# Altium PCB PCB2.PcbDoc (part 1 of 3)
Units mil, origin at the board's own origin, x right, y up, seen from the top; angles counter-clockwise.
Board outline 3877.63 x 3875.01 mil, 2 copper layers (Top Layer, Bottom Layer); 98 components, 72 nets, 361 pads, 109 vias.
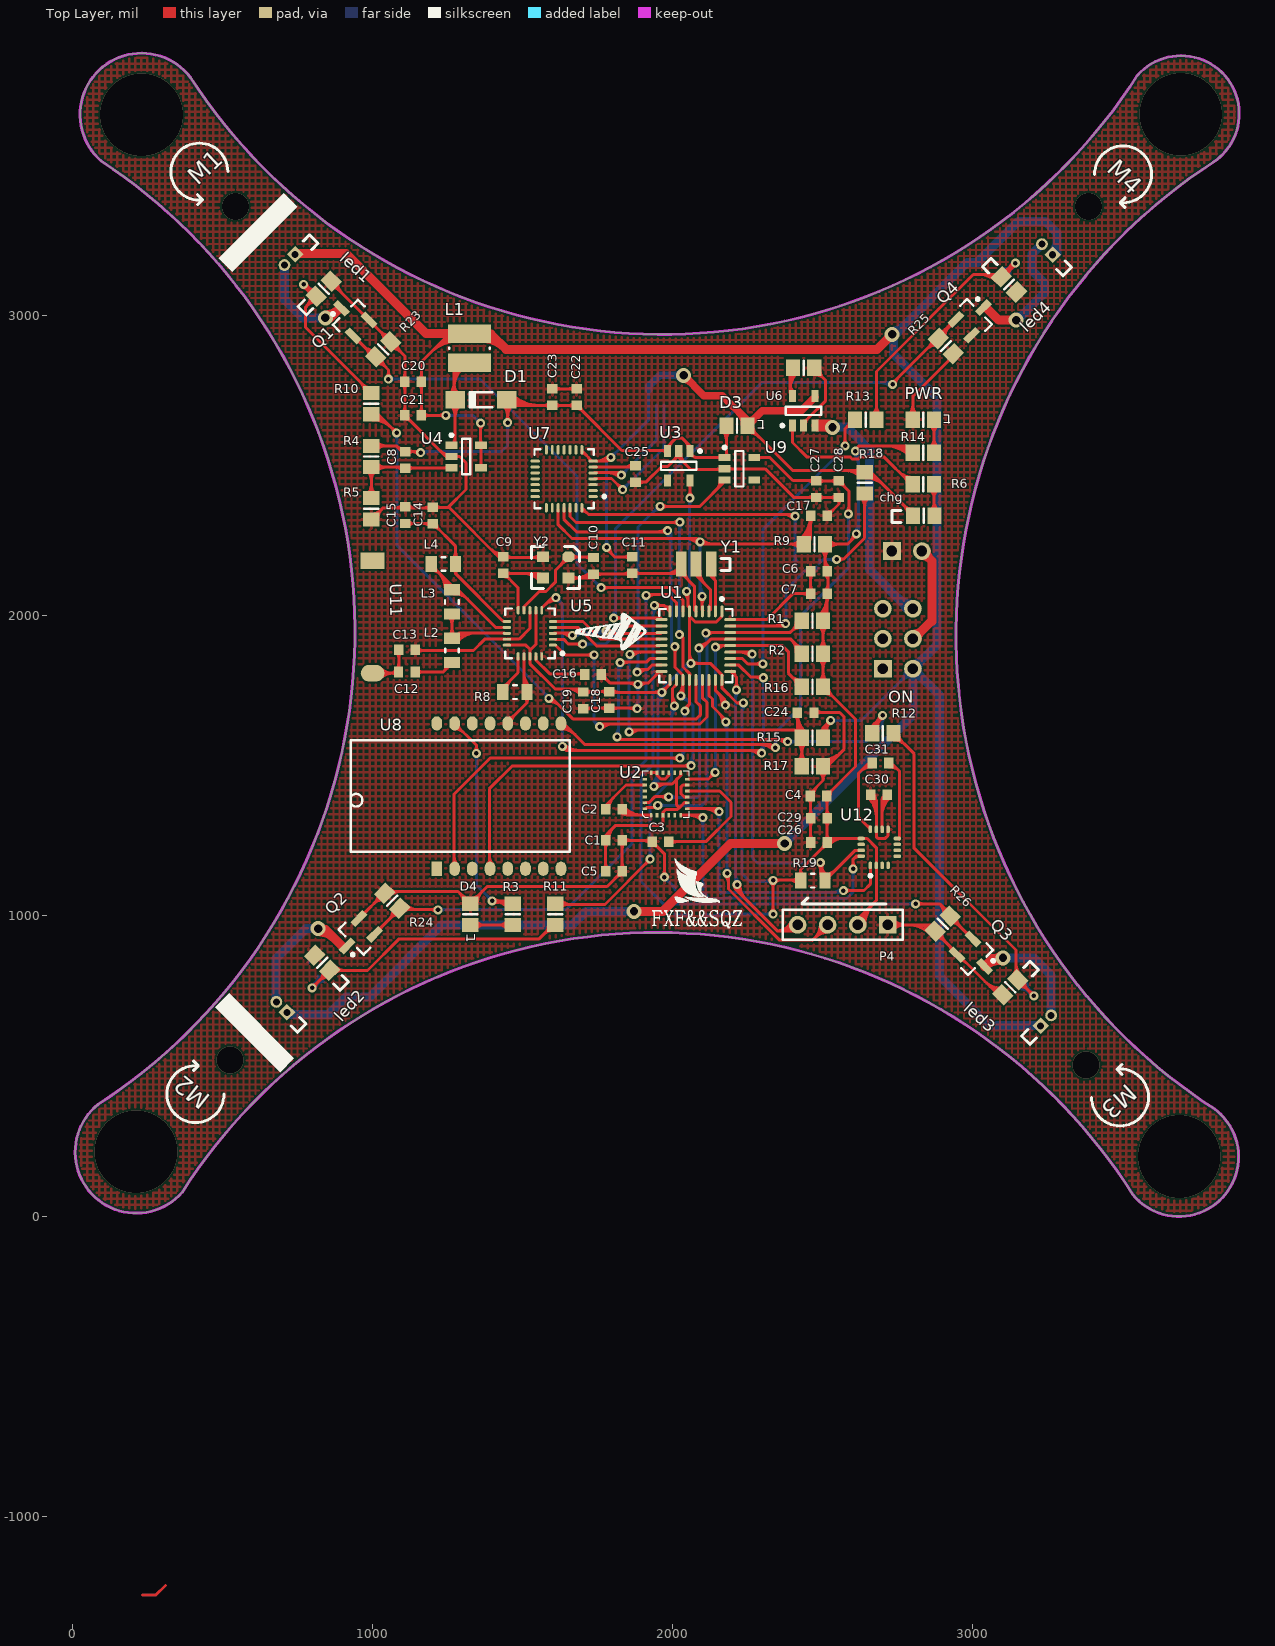
[diagram p0: Top Layer view]
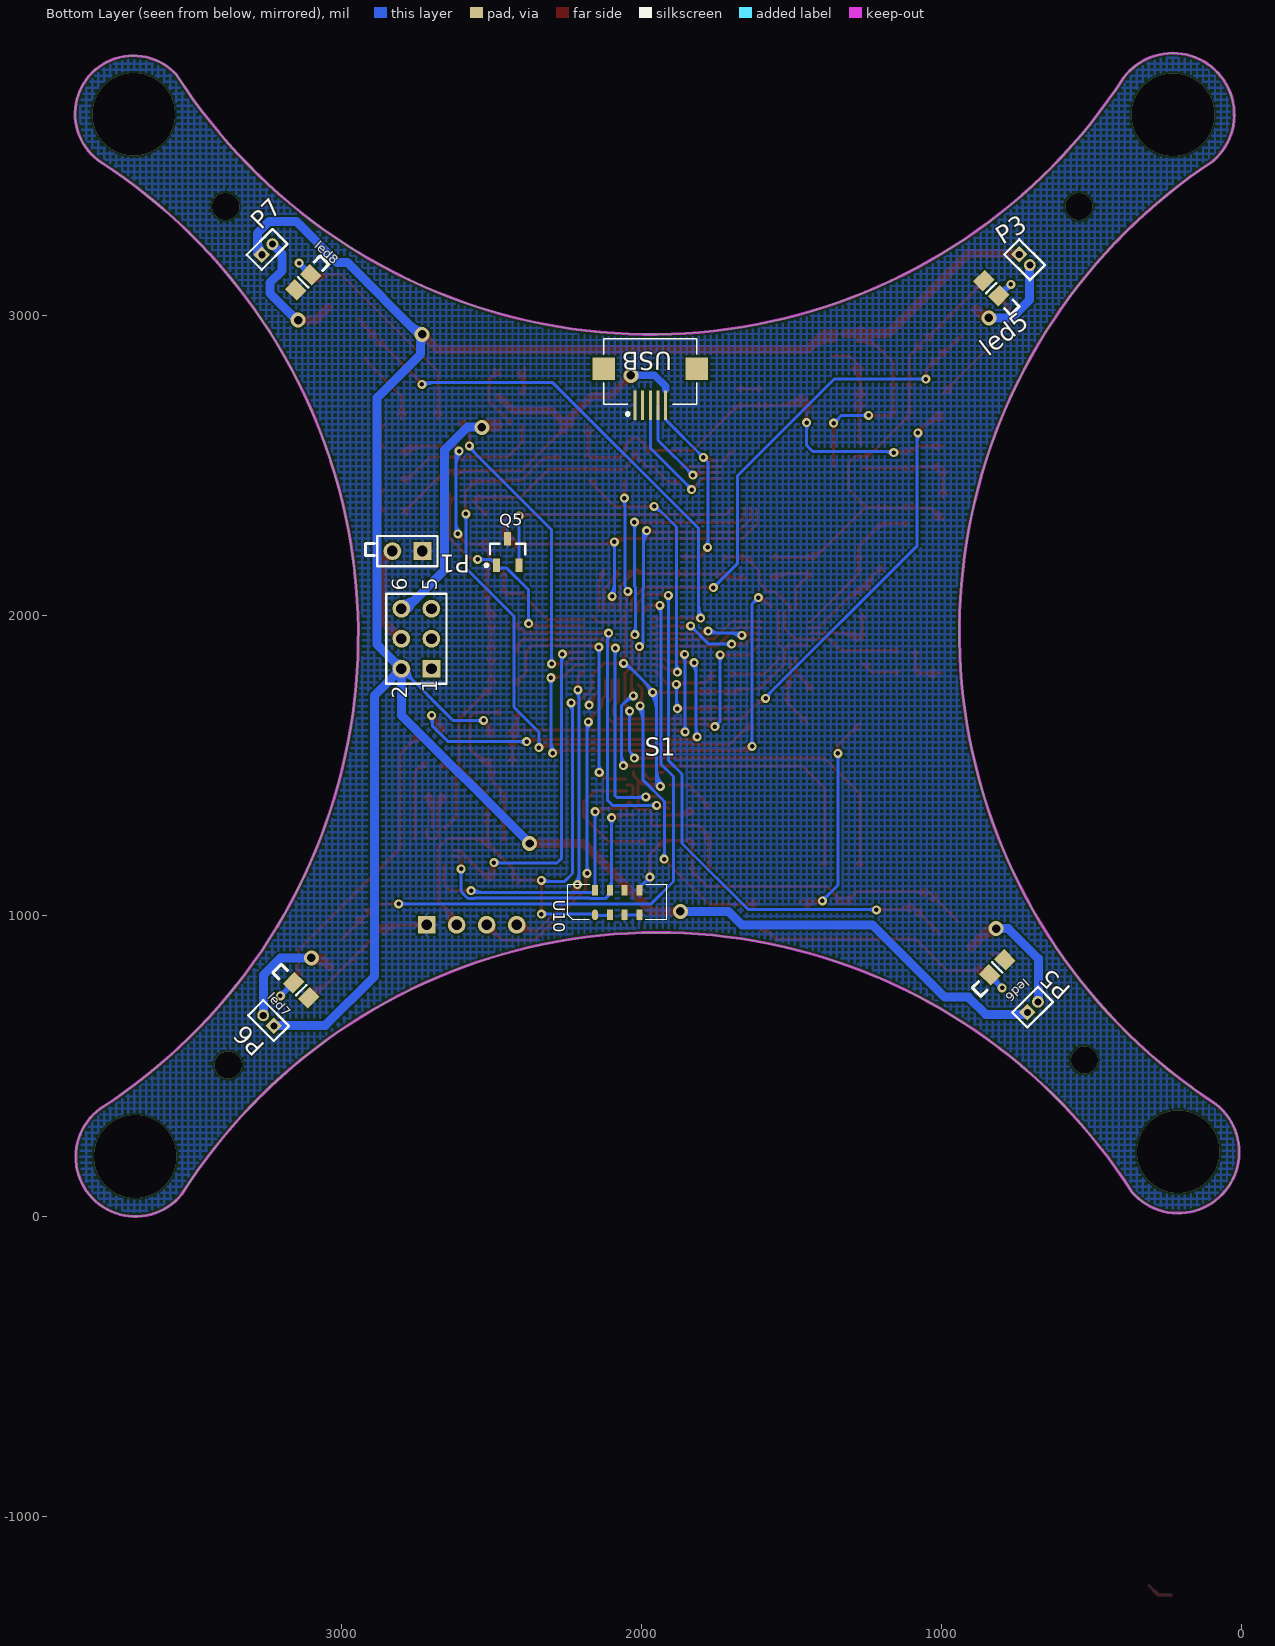
[diagram p1: Bottom Layer view, seen from below]

## Layer stack, top to bottom
Top Layer: signal copper 1.4
Dielectric: dielectric 12.6, FR-4, Dk 4.8
Bottom Layer: signal copper 1.4

## Board outline
86.18,372.01 ccw(c212.62,212.73) 365.52,78.65 cw(c1946.65,-932.35) 3532.41,71.36 ccw(c3686.13,197.12) 3804.23,356.81 cw(c4820.35,1934.65) 3800.24,3509.91 ccw(c3693.09,3671.43) 3547.82,3799.77 cw(c1968.35,4813.35) 392.96,3793.44 ccw(c230.45,3668.91) 97.08,3513.57 cw(c-935.35,1946.35)

## Design rules (kind name [scope] priority, off if disabled: settings)
Clearance [All] p1: gap=6
HoleSize [All] p1: absolutevalues=TRUE maxlimit=300 minlimit=1 maxpercent=80.000 minpercent=20.000
PolygonConnect [All] p1: connectstyle=Relief reliefconductorwidth=10 reliefentries=4 polygonreliefangle="90 Angle"
RoutingVias [All] p1: holewidth=15 width=30 viastyle="Through Hole" minholewidth=12 minwidth=20 maxholewidth=300 maxwidth=300
SMDNeckDown [All] p1: percent=300.000
SilkscreenOverComponentPads [All] p1: minsilkscreentomaskgap=3
SolderMaskExpansion [All] p1: expansion=4
Width [All] p1: maxlimit=40 minlimit=6 preferedwidth=10
26 further rules are at their usual default settings.

## Classes and differential pairs
component class Sheet3: C25 C26 C27 C28 C29 C30 C31 D4 led1 led2 led3 led4 led5 led6 led7 led8 Q5 R3 R10 R11 R12 R13 R18 R19 U7 U8 U9 U10 U12
component class Sheet2: C1 C2 C3 C4 C5 C6 C7 C8 C9 C10 C11 C12 C13 C14 C15 C16 C17 C18 C19 C20 C21 C22 C23 C24 chg D1 D3 L1 L2 L3 L4 P1 P3 P4 P5 P6 P7 PWR Q1 Q2 Q3 Q4 R1 R2 R4 R5 R6 R7 R8 R9 R14 R15 R16 R17 R23 R24 R25 R26 S1 U1 U2 U3 U4 U5 U6 U11 USB Y1 Y2

## Components (designator, comment, footprint, x,y, rotation, side; value= is the part's Value field where it differs from the comment)
C1 "1uf" 1608[0603] 1804,1251.5 r0 top
C2 "2.2nf" 1608[0603] 1804,1355 r180 top
C3 "0.1uf" 1608[0603] 1959,1247 r180 top
C4 "104" 1608[0603] 2486,1399 r180 top
C5 "1uf" 1608[0603] 1804,1148 r0 top
C6 "104" 1608[0603] 2487,2148 r180 top
C7 "2.2uF" 1608[0603] 2487,2073 r180 top
C8 "220PF" 1608[0603] 1109,2519 r270 top
C9 "22p" 1608[0603] 1435,2168 r90 top
C10 "22p" 1608[0603] 1736,2166 r90 top
C11 "10uf" 1608[0603] 1865,2168 r270 top
C12 "1.5pF" 1608[0603] 1114,1812 r0 top
C13 "1pF" 1608[0603] 1115,1886 r180 top
C14 "2.2nF" 1608[0603] 1201,2333 r270 top
C15 "4.7pF" 1608[0603] 1109.41,2334.35 r270 top
C16 "33nF" 1608[0603] 1735,1804 r180 top
C17 "2.2uF" 1608[0603] 2487,2333 r180 top
C18 "104" 1608[0603] 1789,1719 r90 top
C19 "2.2uF" 1608[0603] 1702,1718 r90 top
C20 "10UF" 1608[0603] 1135,2779 r0 top
C21 "104" 1608[0603] 1135,2667 r0 top
C22 "104" 1608[0603] 1680,2727.86 r90 top
C23 "1uF" 1608[0603] 1599,2727.86 r90 top
C24 "1uF" 1608[0603] 2443,1676 r0 top
C25 "2.2uF" 1608[0603] 1876,2472 r90 top
C26 "2.2uF" 1608[0603] 2487,1244 r0 top
C27 "104" 1608[0603] 2478,2421 r270 top
C28 "2.2uF" 1608[0603] 2553,2421 r270 top
C29 "0.1uF" 1608[0603] 2487,1325 r0 top
C30 "4.7uF" 1608[0603] 2687,1403 r0 top
C31 "0.22uF" 1608[0603] 2692,1509 r180 top
chg "LED" 6-0805_N 2836,2332 r0 top
D1 "MBR0520" CAPCP5113X06N 1361,2719 r0 top
D3 "1N4148" 6-0805_N 2214,2633 r180 top
D4 "sta" 6-0805_N 1326,1005 r90 top
L1 "10UH" INDC3035X06N 1323,2891 r270 top
L2 "3.9nH" 0805 1265,1884 r90 top
L3 "8.2nH" 0805 1264,2046 r270 top
L4 "2.7nH" 0805 1236,2172 r180 top
led1 "LED" 6-0805_N 836.97,3089 r45 top
led2 "LED" 6-0805_N 832,843 r135 top
led3 "LED" 6-0805_N 3124,762 r225 top
led4 "LED" 6-0805_N 3120,3103 r315 top
led5 "LED" 6-0805_N 835,3091 r45 bottom
led6 "LED" 6-0805_N 815,828 r135 bottom
led7 "LED" 6-0805_N 3134,752 r225 bottom
led8 "LED" 6-0805_N 3127,3110 r315 bottom
P1 "Header 2" HDR1X2 2730,2215 r0 bottom
P3 "Motor1" MHDR1X2 741.97,3203 r225 bottom
P4 "SWD" HDR1X4 2716,970 r180 top
P5 "Motor2" MHDR1X2 715,678 r135 bottom
P6 "Motor3" MHDR1X2 3225,633 r45 bottom
P7 "Motor4" MHDR1X2 3265,3202 r135 bottom locked
PWR "LED" 6-0805_N 2835,2653 r180 top
Q1 "SI2302" SOT23_M 929,2991 r135 top
Q2 "SI2302" SOT23_M 948,932 r225 top
Q3 "SI2302" SOT23_M 3006,864 r315 top
Q4 "SI2302" SOT23_M 3002,2993 r45 top
Q5 "S8050" SOT-23B_N 2446,2212 r90 bottom
R1 "3K" 6-0805_N 2465.35,1983 r180 top
R2 "3K" 6-0805_N 2465.35,1873 r180 top
R3 "100" 6-0805_N 1467,1005 r270 top
R4 "33K" 6-0805_N 996,2530 r270 top
R5 "10K" 6-0805_N 996,2356 r90 top
R6 "100R" 6-0805_N 2835,2438 r180 top
R7 "1.65K" 6-0805_N 2436,2825 r180 top
R8 "22K" 0805 1474,1745 r0 top
R9 "10K" 6-0805_N 2472,2238 r0 top
R10 "360R" 6-0805_N 996,2706 r270 top
R11 "360R" 6-0805_N 1608,1005 r90 top
R12 "360R" 6-0805_N 2700,1608 r0 top
R13 "360R" 6-0805_N 2643,2652 r0 top
R14 "1.65K" 6-0805_N 2835,2543 r0 top
R15 "33K" 6-0805_N 2465.35,1593 r0 top
R16 "3K" 6-0805_N 2465.35,1763 r0 top
R17 "33K" 6-0805_N 2465.35,1498 r0 top
R18 "10K" 6-0805_N 2639,2442 r270 top
R19 "3K" 0805 2466.33,1117 r180 top
R23 "10K" 6-0805_N 1035,2887 r45 top
R24 "33K" 6-0805_N 1065,1050 r135 top
R25 "33k" 6-0805_N 2910,2898 r315 top
R26 "33k" 6-0805_N 2899,974 r225 top
S1 "SW-SPDT" HDR2X3 2700,1823 r90 bottom
U1 "STM32F10T8U6" stm32f1038tu6 2077,1900 r270 top
U2 "MPU6050" U8 1928,1335 r90 top
U3 "MIC5205-3.3" SOT95P280X120-5N 2020,2499 r270 top
U4 "LM27313" SOT95P280X120-5N 1311.79,2530 r0 top
U5 "NRF24L01" QFN-ML20_L 1524.2,1941 r180 top
U6 "LTC4054" SOT95P280X120-5N 2436,2682 r90 top
U7 "CP2102" cp2102 1638,2455.69 r180 top
U8 "HM-06" HM-11 1355,1388 r90 top
U9 "MIC5205-3.3" SOT95P280X120-5N 2222,2489.16 r0 top
U10 "MS5611" "U6 - duplicate1" 2155,1003 r90 bottom
U11 "ANT" AN9520-245 995,2008 r180 top
U12 "HMC5833" QFN50P302X302X90-16N 2687.76,1228 r90 top
USB "Header 5" USB_MICRO_B 1971,2701 r90 bottom
Y1 "XTAL8M" CAPC1219X07N 2103,2172 r180 top
Y2 "Component_1" XTAL16MHz 1653,2200.5 r180 top

## Footprints (in the part's own frame and the unit in brackets; to place one, negate y for a bottom-side part, rotate by r counter-clockwise, add the part's x,y. Pads: shape width x height; smd on the part's side, far side on the other; paste and mask are expansions set on the pad)
6-0805_N [mm]
  rect 1.2x1.4 smd: 1(-0.9,0) 2(0.9,0)
  silkscreen extent 0,-0.6 0,0.6, body extent -1.07,-0.7 1.07,0.7, height 0.7
0805 [mm] "Chip Capacitor, 2-Leads, Body 2.0x1.2mm, IPC Medium Density"
  rect 0.95x1.35 smd: 1(-1.025,0) 2(1.025,0)
  silkscreen extent -0.15,-0.58 0.15,0.58, body extent -1.05,-0.65 1.05,0.65, height 0.5
1608[0603] [mm] "Chip Capacitor, Body 1.6x0.8mm, IPC High Density"
  rect 0.8x0.9 smd: 1(-0.7,0) 2(0.7,0)
  body extent -0.87,-0.48 0.87,0.48, height 1.3
AN9520-245 [mm]
  oval 2x1.4 smd: 1(-0.127,5.08)
  rect 2x1.4 smd: 2(-0.127,-4.42)
CAPC1219X07N [mm] "Chip Capacitor, 2-Leads, Body 1.2x1.9mm, IPC Medium Density"
  rect 0.9x2.1 smd: 1(-0.65,0) 2(0.65,0) 3(1.905,0)
  body extent 0.03,-2.05 1.29,-0.05, height 0.7
CAPCP5113X06N [mm] "Chip Capacitor, 2-Leads, Body 5.1x1.3mm, IPC Medium Density"
  rect 1.65x1.45 smd: 1(-2.175,0) 2(2.175,0)
  silkscreen extent -0.95,-0.63 0.95,0.62, body extent -2.6,-0.7 2.6,0.7, height 0.6
cp2102 [mm]
  oval 0.8x0.25 smd: 1(-2.45,1.5) 2(-2.45,1) 3(-2.45,0.5) 4(-2.45,0) 5(-2.45,-0.5) 6(-2.45,-1) 7(-2.45,-1.5) 15(2.45,-1.5) 16(2.45,-1) 17(2.45,-0.5) 18(2.45,0) 19(2.45,0.5) 20(2.45,1) 21(2.45,1.5)
  oval 0.25x0.8 smd: 8(-1.5,-2.45) 9(-1,-2.45) 10(-0.5,-2.45) 11(0,-2.45) 12(0.5,-2.45) 13(1,-2.45) 14(1.5,-2.45) 22(1.5,2.45) 23(1,2.45) 24(0.5,2.45) 25(0,2.45) 26(-0.5,2.45) 27(-1,2.45) 28(-1.5,2.45)
  silkscreen extent -3.53,-2.5 2.5,2.5, body extent -2.5,-2.5 2.5,2.5, height 1
HDR1X2 [mm] "Connector; Header; 2 Position"
  rect 1.5x1.5 hole 0.9: 1(0,0)
  round 1.5 hole 0.9: 2(2.54,0)
  silkscreen extent -1.27,-1.27 3.81,1.27
HDR1X4 [mm] "Connector; Header; 4 Position"
  rect 1.5x1.5 hole 0.9: 1(0,0)
  round 1.5 hole 0.9: 2(2.54,0) 3(5.08,0) 4(7.62,0)
  silkscreen extent -1.27,-1.27 8.89,1.27
HDR2X3 [mm]
  rect 1.5x1.5 hole 0.9: 1(0,0)
  round 1.5 hole 0.9: 2(0,2.54) 3(2.54,0) 4(2.54,2.54) 5(5.08,0) 6(5.08,2.54)
  silkscreen extent -1.27,-1.27 6.35,3.81
HM-11 [mm]
  rect 1.2x0.9 smd: 1(-5.875,3.575)
  oval 1.2x0.9 smd: 2(-5.875,2.075) 3(-5.875,0.575) 4(-5.875,-0.925) 5(-5.875,-2.425) 6(-5.875,-3.925) 7(-5.875,-5.425) 8(-5.875,-6.925) 9(6.425,-6.925) 10(6.425,-5.425) 11(6.425,-3.925) 12(6.425,-2.425) 13(6.425,-0.925) 14(6.425,0.575) 15(6.425,2.075) 16(6.425,3.575)
  silkscreen extent -4.45,-7.68 4.99,10.88
INDC3035X06N [mm] "Chip Inductor, 2-Leads, Body 3.0x3.5mm, IPC Medium Density"
  rect 1.55x3.65 smd: 1(-1.225,0) 2(1.225,0)
  silkscreen extent -0.05,-1.73 0.05,1.73, body extent -1.55,-1.8 1.55,1.8, height 0.6
MHDR1X2 [mm] "Connector; Header; 2 Position"
  rect 1x1 hole 0.6: 1(0,0)
  round 1 hole 0.6: 2(1.27,0)
  silkscreen extent -0.9,-0.9 2.17,0.9
QFN50P302X302X90-16N [mm] "QFN, 16-Leads, Body 3.0x3.0mm (max), Pitch 0.50mm, IPC Medium Density"
  oval 0.65x0.3 smd: 1(-1.525,0.75) 2(-1.525,0.25) 3(-1.525,-0.25) 4(-1.525,-0.75) 9(1.525,-0.75) 10(1.525,-0.25) 11(1.525,0.25) 12(1.525,0.75)
  oval 0.3x0.65 smd: 5(-0.75,-1.525) 6(-0.25,-1.525) 7(0.25,-1.525) 8(0.75,-1.525) 13(0.75,1.525) 14(0.25,1.525) 15(-0.25,1.525) 16(-0.75,1.525)
  silkscreen extent -2.52,0.63 -2.28,0.87
QFN-ML20_L [mm]
  oval 0.7x0.25 smd: 1(-1.95,1) 2(-1.95,0.5) 3(-1.95,0) 4(-1.95,-0.5) 5(-1.95,-1) 11(1.95,-1) 12(1.95,-0.5) 13(1.95,0) 14(1.95,0.5) 15(1.95,1)
  oval 0.25x0.7 smd: 6(-1,-1.95) 7(-0.5,-1.95) 8(0,-1.95) 9(0.5,-1.95) 10(1,-1.95) 16(1,1.95) 17(0.5,1.95) 18(0,1.95) 19(-0.5,1.95) 20(-1,1.95)
  silkscreen extent -2.88,-2.1 2.1,2.1
SOT23_M [mm] "SOT23, 3-Leads, Body 2.9x1.3mm, Pitch 0.95mm, Lead Span 2.3mm - Reverse Pinning, IPC Low Density"
  rect 1.45x0.6 smd: 1(1.175,0) 2(-1.175,-0.95) 3(-1.175,0.95)
  silkscreen extent -0.1,-1.5 1.47,1.5, body extent -0.7,-1.5 0.7,1.5, height 1.1
SOT95P280X120-5N [mm] "SOT23, 5-Leads, Body 3.0x3.0mm (max), Pitch 0.95mm, IPC Medium Density"
  rect 1x0.6 smd: 1(-1.25,0.95) 2(-1.25,0) 3(-1.25,-0.95) 4(1.25,-0.95) 5(1.25,0.95)
  silkscreen extent -1.37,-1.5 0.35,1.93, body extent -0.85,-1.5 0.85,1.5, height 1.2
SOT-23B_N [mm] "SOT23, 3-Leads, Body 2.9x1.3mm, Pitch 0.95mm, Lead Span 2.4mm, IPC Medium Density"
  rect 1.15x0.6 smd: 1(-1.125,0.95) 2(-1.125,-0.95) 3(1.125,0)
  silkscreen extent -1.25,-1.5 0.7,1.93, body extent -0.7,-1.5 0.7,1.5, height 1.14
stm32f1038tu6 [mm] "QFN, 36-Leads, Body 6.1x6.1mm (max), Pitch 0.55mm, IPC Medium Density"
  oval 1x0.25 smd: 1(-2.9,2.2) 2(-2.9,1.65) 3(-2.9,1.1) 4(-2.9,0.55) 5(-2.9,0) 6(-2.9,-0.55) 7(-2.9,-1.1) 8(-2.9,-1.65) 9(-2.9,-2.2) 19(2.9,-2.2) 20(2.9,-1.65) 21(2.9,-1.1) 22(2.9,-0.55) 23(2.9,0) 24(2.9,0.55) 25(2.9,1.1) 26(2.9,1.65) 27(2.9,2.2)
  oval 0.25x1 smd: 10(-2.2,-2.9) 11(-1.65,-2.9) 12(-1.1,-2.9) 13(-0.55,-2.9) 14(0,-2.9) 15(0.55,-2.9) 16(1.1,-2.9) 17(1.65,-2.9) 18(2.2,-2.9) 28(2.2,2.9) 29(1.65,2.9) 30(1.1,2.9) 31(0.55,2.9) 32(0,2.9) 33(-0.55,2.9) 34(-1.1,2.9) 35(-1.65,2.9) 36(-2.2,2.9)
  silkscreen extent -4.07,-3.1 3.1,3.1, body extent -3.06,-3.06 3.06,3.06, height 1
"U6 - duplicate1" [mm]
  oval 0.9x0.5 smd: 1(0,0)
  rect 0.9x0.5 smd: 2(0,-1.25) 3(0,-2.5) 4(0,-3.75) 5(2.1,-3.75) 6(2.1,-2.5) 7(2.1,-1.25) 8(2.1,0)
  silkscreen extent -0.42,-6.1 2.54,2.33
U8 [mm]
  oval 0.4x0.23 smd: 1(0,0)
  rect 0.4x0.23 smd: 2(0,-0.5) 3(0,-1) 4(0,-1.5) 5(0,-2) 6(0,-2.5) 13(3.6,-2.5) 14(3.6,-2) 15(3.6,-1.5) 16(3.6,-1) 17(3.6,-0.5) 18(3.6,0)
  rect 0.23x0.4 smd: 7(0.55,-3.05) 8(1.05,-3.05) 9(1.55,-3.05) 10(2.05,-3.05) 11(2.55,-3.05) 12(3.05,-3.05) 19(3.05,0.55) 20(2.55,0.55) 21(2.05,0.55) 22(1.55,0.55) 23(1.05,0.55) 24(0.55,0.55)
  silkscreen extent -0.18,-3.22 3.77,0.73
USB_MICRO_B [mm]
  rect 2.5x0.25 smd: 1(0,-1.3) 2(0,-0.65) 3(0,0) 4(0,0.65) 5(0,1.3)
  rect 1.9x1.9 smd: ""(3.095,-3.95) ""(3.095,3.95)
  silkscreen extent -0.87,-3.94 5.6,3.94, body extent 0.24,-4 5.67,3.98, height 2.71
XTAL16MHz [mm] "无"
  oct 1x0.9 smd: 1(0,0.127)
  rect 1x0.9 smd: 2(2.159,0.127) 3(2.159,1.905) 4(0,1.905)

## Part data
C1 C2 C3 C4 C5 C6 C7 C8 C9 C10 C11 C12 C13 C14 C15 C16 C17 C18 C19 C20 C21 C22 C23 C24 C25 C26 C27 C28 C29 C30 C31: library part "Cap Semi", "Capacitor (Semiconductor SIM Model)"
chg led1 led2 led3 led4 led5 led6 led7 led8 PWR: library part LED2, "Typical RED, GREEN, YELLOW, AMBER GaAs LED"
D1: library part "D Zener", "Zener Diode"
D3 D4: library part Diode, "Default Diode"
L1 L2 L3 L4: library part Inductor, "Inductor"
P1: "Header, 2-Pin"
P3 P5 P6 P7: library part MHDR1X2, "Header, 2-Pin"
P4: library part "Header 4", "Header, 4-Pin"
Q1 Q2 Q3 Q4 U5 U10 U11 U12: library part Component_1
Q5: library part QNPN, "NPN Bipolar Transistor"
R1 R2 R3 R4 R5 R6 R7 R9 R10 R11 R12 R13 R14 R15 R16 R17 R18 R23 R24 R25 R26: library part "Res Thermal"
R8 R19: library part Res3, "Resistor"
S1: library part SW-SPD, "SPDT Subminiature Toggle Switch, Right Angle Mounting, Vertical Actuat"
U8: library part bluetooth
USB: "Header, 5-Pin"

## Via types
v1: diameter 30, hole 15, Top Layer to Bottom Layer, 92 vias
v2: diameter 50, hole 28, Top Layer to Bottom Layer, 9 vias
v3: diameter 275.59, hole 275.59, Top Layer to Bottom Layer, 4 vias
v4: diameter 90.55, hole 90.55, Top Layer to Bottom Layer, 4 vias

## Nets (pads, with @x,y where several pads share a name; then routed paths per layer and width w, separated by ;. In a path a pad name is that pad's centre, name@x,y a point inside that pad or via, vN(x,y) a via of type N, cw(c..) or ccw(c..) an arc to the next point about the centre after c; other vN are vias at no path point)
AUXDA: U2.6 U10.7 U12.16 | length 1219.5
  Top Layer w10: U2.6@2026.42,1335 2100,1335 v1(2100,1327) ccw(c2080.69,1307.69) 2080.69,1335 ; 2056.54,1335 cw(c2056.54,1283.54) v1@2092.93,1319.93 ; v1@2593.93,1163.07 ccw(c2576.86,1180.14) 2601,1180.14 ccw(c2625.14,1180.14) v1@2608.07,1163.07 ; v1(2601,1156) 2601,1188.69 2610.78,1198.47 U12.16@2627.72,1198.47 ; 2602.13,1189.82 cw(c2620.83,1171.12) U12.16@2620.83,1197.57
  Bottom Layer w10: v1@2092.93,1319.93 cw(c2075.86,1302.86) 2100,1302.86 cw(c2124.14,1302.86) v1@2107.07,1319.93 ; U10.7@2100,1088 v1(2100,1327) ; 2100,1119.22 ccw(c2131.45,1119.22) U10.7@2109.21,1096.98 ; U10.7@2101,1077 2121.04,1056.96 2169.4,1056.96 2171.44,1059 2556.23,1059 2557.23,1058 2578.77,1058 2601,1080.23 v1(2601,1156) ; U10.7@2110.63,1077.8 ccw(c2135.82,1077.8) 2118.01,1059.99 ; v1@2593.93,1148.93 cw(c2576.86,1131.86) 2601,1131.86 cw(c2625.14,1131.86) v1@2608.07,1148.93
AUXDL: U2.7 U10.8 U12.1 | length 1194.8
  Top Layer w10: U2.7@2048.08,1356.65 2154.35,1356.65 v1(2154.35,1346.65) ccw(c2130.2,1322.51) 2130.2,1356.65 ; 2106.06,1356.65 cw(c2106.06,1298.37) v1@2147.27,1339.58 ; v1@2563,1084 2637,1084 2658.24,1105.24 U12.1@2658.24,1167.96 ; v1@2575.07,1076.93 cw(c2592.14,1059.86) 2592.14,1084 cw(c2592.14,1108.14) v1@2575.07,1091.07
  Bottom Layer w10: v1@2147.27,1339.58 cw(c2130.2,1322.51) 2154.35,1322.51 cw(c2178.49,1322.51) v1@2161.42,1339.58 ; U10.8@2151.58,1096.98 ccw(c2144.89,1103.66) 2154.35,1103.66 ; U10.8@2154.35,1090.35 v1(2154.35,1346.65) ; 2154.35,1106.82 ccw(c2168.27,1106.82) U10.8@2158.42,1096.98 ; U10.8@2155,1087 2164,1078 2557,1078 2563,1084 v1(2568,1084) cw(c2553.51,1098.49) 2553.51,1078 ; U10.8@2158.42,1074.38 cw(c2167.16,1065.64) 2167.16,1078 ; U10.8@2158.42,1081.23 ccw(c2166.22,1089.02) 2166.22,1078 ; 2529.37,1078 ccw(c2529.37,1122.63) v1@2560.93,1091.07
BAT: P1.2 S1.4 | length 438
  Top Layer w30: S1.4@2800,1937.53 ccw(c2800,1979.84) 2829.92,1949.92 ; S1.4@2805,1925 2861,1981 ; S1.4@2814.53,1923 cw(c2842.36,1923) 2822.68,1942.68 ; P1.2@2830,2200.47 cw(c2830,2165.4) 2854.8,2190.2 cw(c2879.6,2215) P1.2@2844.53,2215 ; P1.2@2830,2215 2863,2182 2863,1980
BAT_CHECK: C24.1 R15.1 R17.1 U1.15 | length 1640.2
  Top Layer w10: v1(1855,1613) cw(c1869.49,1598.51) 1869.49,1619 ; v1(1857,1871) cw(c1874.73,1853.27) 1874.73,1878.35 ; v1@1857,1878.35 U1.15@1962.83,1878.35 ; v1@1859,1613 1865,1619 2408,1619 R15.1@2422,1605 ; v1@1862.07,1605.93 cw(c1893.63,1574.37) 1893.63,1619 ; v1@1864.07,1863.93 cw(c1898.88,1829.12) 1898.88,1878.35 ; C24.1@2407.84,1666.43 cw(c2389.49,1648.08) 2415.44,1648.08 cw(c2441.39,1648.08) C24.1@2423.04,1666.43 ; 2415.44,1628.22 ccw(c2460.73,1628.22) R15.1@2428.95,1595.96 ; 2415.44,1652.11 ccw(c2484.27,1652.11) R15.1@2435.96,1603.08 ; R17.1@2416.75,1515.1 ccw(c2384.75,1547.1) 2430,1547.1 ; R15.1@2416.75,1575.9 cw(c2384.75,1543.9) 2430,1543.9 ; R17.1@2430,1501 2430,1584 2415.44,1598.56 C24.1@2415.44,1676 ccw(c2507.8,1676) R15.1@2442.98,1610.2 ; 2430,1544.31 cw(c2474.66,1544.31) R15.1@2443.08,1575.9 ; 2430,1546.69 ccw(c2474.66,1546.69) R17.1@2443.08,1515.1
  Bottom Layer w10: v1@1847.93,1620.07 ccw(c1830.86,1637.14) 1855,1637.14 ccw(c1879.14,1637.14) v1@1862.07,1620.07 ; v1@1849.93,1863.93 cw(c1837.69,1851.69) 1855,1851.69 ; v1@1855,1617 v1@1855,1868 ; 1855,1842.03 cw(c1885.97,1842.03) v1@1864.07,1863.93
BOOT0: Q5.1 R18.2 U1.35 | length 1052.9
  Top Layer w10: U1.35@2191.17,1964.96 v1@2373,1964.96 ; 2332.45,1964.96 ccw(c2332.45,2016.55) v1@2368.93,1980.07 ; 2356.59,1964.96 ccw(c2356.59,1992.41) v1(2376,1973) ; v1@2548,2188 2569,2188 ; v1@2553.07,2194.07 ccw(c2567.73,2208.73) 2567.73,2188 ; v1@2553.78,2180.72 cw(c2569,2168.46) 2569,2188 ; R18.2@2625.83,2393.4 cw(c2594.04,2361.61) 2639,2361.61 cw(c2683.96,2361.61) R18.2@2652.17,2393.4 ; R18.2@2639,2406.57 2639,2258 2569,2188
  Bottom Layer w10: v1@2368.93,1980.07 ccw(c2349.44,1999.56) 2377,1999.56 ; v1@2377,1970 2377,2087 2377.9,2087 2448.9,2158 Q5.1@2483,2158 ; 2377,1994.73 ccw(c2397.73,1994.73) v1@2383.07,1980.07 ; 2464.26,2158 cw(c2464.26,2137.74) Q5.1@2478.59,2152.07 ; 2469.66,2158 ccw(c2469.66,2170.62) Q5.1@2478.59,2161.7 ; Q5.1@2486.52,2184.59 ccw(c2492.61,2196.39) 2502,2187 ; Q5.1@2487,2172 2502,2187 ; v1@2538.93,2179.93 ccw(c2521.86,2162.86) 2521.86,2187 ccw(c2521.86,2211.14) v1@2538.93,2194.07 ; v1(2546,2187) 2502,2187
BT_EN: U1.17 U9.3 | length 1146.2
  Top Layer w10: v1(1881,1812) cw(c1896.55,1800.88) 1896.55,1820 ; v1@1885,1820 1916,1820 ; v1@1889.13,1806.18 cw(c1916,1786.97) 1916,1820 ; v1(1958,2364) 1959,2363 2089,2363 U9.3@2175,2449 ; U1.17@1962.83,1835.04 1931.04,1835.04 1916,1820 ; v1@1965.07,2356.93 cw(c1979.73,2342.27) 1979.73,2363 ; v1@1965.07,2371.07 ccw(c1984.56,2390.56) 1984.56,2363 ; 2144.21,2418.21 ccw(c2110.66,2451.76) U9.3@2158.1,2451.76 ; 2161.28,2435.28 ccw(c2144.8,2451.76) U9.3@2168.1,2451.76
  Bottom Layer w10: v1@1873.93,1819.07 ccw(c1849.62,1843.38) 1884,1843.38 ; 1884,1828.9 ccw(c1897.9,1828.9) v1@1888.07,1819.07 ; v1@1889,1816 1884,1821 1884,2295 v1@1955.5,2366.5 ; 1932.39,2343.39 cw(c1958,2317.79) v1@1958,2354 ; 1944.46,2355.46 ccw(c1935.93,2364) v1@1948,2364 ; v1(1958,2364) v1@1958,2372
CE: U1.24 U5.1 | length 1070.7
  Top Layer w10: U5.1@1611,1900 1642,1869 v1(1738,1869) ; v1@1730.93,1861.93 ccw(c1713.86,1844.86) 1713.86,1869 ccw(c1713.86,1893.14) v1@1730.93,1876.07 ; v1@1763.07,1622.93 cw(c1801.87,1584.13) 1801.87,1639 ; 1777.73,1639 ccw(c1777.73,1608.27) v1(1756,1630) 1765,1639 2091,1639 2114,1662 2114,1711 2098.65,1726.35 U1.24@2098.65,1785.83
  Bottom Layer w10: v1@1730.93,1861.93 cw(c1713.86,1844.86) 1738,1844.86 cw(c1762.14,1844.86) v1@1745.07,1861.93 ; v1@1736,1869 v1(1738,1869) 1738,1648 v1(1756,1630) ; v1@1746,1630 ccw(c1721.86,1630) 1738.93,1647.07 ccw(c1756,1664.14) v1@1756,1640
CHG5V: C11.1 chg.1 D3.1 R18.1 U6.4 U7.7 U7.8 USB.1 | length 3005.6
  Top Layer w10: U7.8@1697.06,2541.4 cw(c1697.06,2523.19) 1709.93,2536.07 ; U7.8@1697.06,2552.15 1697.06,2548.94 U7.7@1731,2515 ; 1718.37,2527.63 cw(c1705.5,2514.75) U7.7@1723.71,2514.75 ; 1767.27,2515 ccw(c1767.27,2550.76) v1(1794,2527) 1782,2515 ; v1@1776,2226 1806.44,2195.56 C11.1@1865,2195.56 ; v1@1780,2217 cw(c1780,2204.93) 1788.54,2213.46 ; v1@1784.39,2524.24 cw(c1775.35,2521.65) 1782,2515 ; v1@1786.53,2533.64 cw(c1745,2570.56) 1745,2515 1782,2515 ; v1@1790,2227 ccw(c1826.21,2227) 1800.61,2201.39 ; v1@1791.24,2517.39 ccw(c1788.65,2508.35) 1782,2515 ; C11.1@1855.43,2187.96 ccw(c1837.08,2169.61) 1837.08,2195.56 ccw(c1837.08,2221.51) C11.1@1855.43,2203.16 ; D3.1@2246,2650 D3.1@2246,2652 ; D3.1@2249.43,2610.44 cw(c2249.43,2555.98) 2287.94,2594.49 ; D3.1@2249.43,2620.44 cw(c2249.43,2590.12) D3.1@2270.87,2611.56 ; D3.1@2249.43,2633 2399.43,2483 2643,2483 R18.1@2645,2481 ; D3.1@2268.05,2629.06 ccw(c2303.51,2629.06) 2278.44,2603.99 ; 2576.67,2483 cw(c2576.67,2419.04) R18.1@2621.9,2464.27 ; 2600.81,2483 cw(c2600.81,2443.18) R18.1@2628.97,2471.34 ; 2603.54,2483 ccw(c2603.54,2508.95) R18.1@2621.9,2490.6 ; R18.1@2639,2477.43 2659.57,2477.43 chg.1@2796,2341 ; R18.1@2642.94,2458.81 cw(c2642.94,2373.71) 2703.11,2433.89 ; R18.1@2642.94,2468.81 cw(c2642.94,2407.85) 2686.04,2450.96 ; R18.1@2642.94,2478.81 cw(c2642.94,2441.99) 2668.97,2468.03 ; 2768.43,2368.57 cw(c2735.79,2335.94) chg.1@2781.95,2335.94 ; 2769.62,2367.38 ccw(c2800.57,2398.32) chg.1@2800.57,2354.56
  Top Layer w25: v2@2036,2787.5 cw(c2036,2757.32) 2057.34,2778.66 cw(c2078.68,2800) v2@2048.5,2800 ; v2(2036,2800) 2103,2733 2165,2733 D3.1@2246,2652 ; 2222.22,2675.78 cw(c2183.38,2636.94) D3.1@2238.31,2636.94 ; D3.1@2249.43,2633 2298.43,2682 2428,2682 U6.4@2475,2729 ; D3.1@2249.43,2648.06 ccw(c2249.43,2684.41) 2275.14,2658.71
  Bottom Layer w10: v1@1772.93,2234.07 ccw(c1758.27,2248.73) 1779,2248.73 ; 1779,2253.56 ccw(c1806.56,2253.56) v1@1787.07,2234.07 ; v1@1781,2231 1779,2233 1779,2512 v1(1794,2527) 1919.82,2652.82 USB.1@1919.82,2701 1919.82,2751.82 ; v1@1794,2537 ccw(c1794,2561.14) 1811.07,2544.07 ccw(c1828.14,2527) v1@1804,2527 ; 1917.2,2650.2 ccw(c1910.7,2656.71) USB.1@1919.9,2656.71
  Bottom Layer w25: 1919.82,2751.82 1919.82,2763.82 1957,2801 v2@2036,2801 ; 2003.41,2801 cw(c2003.41,2767.41) v2@2027.16,2791.16 ; 2008.24,2801 ccw(c2008.24,2827.76) v2@2027.16,2808.84
  other v1: 1780,2227
CSN: U1.11 U5.2 | length 538.8
  Top Layer w10: U5.2@1608,1921 1637,1921 1653,1905 v1(1700,1905) ; v1@1692.93,1897.93 ccw(c1675.86,1880.86) 1675.86,1905 ccw(c1675.86,1929.14) v1@1692.93,1912.07 ; v1(1837,1966) 1838.04,1964.96 U1.11@1962.83,1964.96 ; v1@1844.07,1958.93 cw(c1858.63,1944.37) 1858.63,1964.96 ; v1@1844.07,1973.07 ccw(c1863.65,1992.65) 1863.65,1964.96
  Bottom Layer w10: v1(1700,1905) 1776,1905 v1(1837,1966) ; v1@1707.07,1897.93 cw(c1724.14,1880.86) 1724.14,1905 cw(c1724.14,1929.14) v1@1707.07,1912.07 ; v1@1827,1966 cw(c1802.86,1966) 1819.93,1948.93 cw(c1837,1931.86) v1@1837,1956
D+: U7.4 USB.3 | length 525.3
  Top Layer w10: U7.4@1737,2457 1796,2457 v1(1833,2420) ; v1@1823,2420 ccw(c1798.86,2420) 1815.93,2437.07 ccw(c1833,2454.14) v1@1833,2430
  Bottom Layer w10: v1(1833,2420) 1971,2558 USB.3@1971,2701 ; v1@1833,2430 ccw(c1833,2454.14) 1850.07,2437.07 ccw(c1867.14,2420) v1@1843,2420
D-: U7.5 USB.2 | length 473.3
  Top Layer w10: U7.5@1740,2476 1821,2476 v1(1829,2468) ccw(c1809.69,2448.69) 1809.69,2476 ; 1785.54,2476 cw(c1785.54,2424.54) v1@1821.93,2460.93
  Bottom Layer w10: v1(1829,2468) 1945.41,2584.41 USB.2@1945.41,2701 ; v1@1829,2478 ccw(c1829,2502.14) 1846.07,2485.07 ccw(c1863.14,2468) v1@1839,2468